# Altium PCB PCB - 100x100 - 85x85.PcbDoc
Units mil, origin at the board's own origin, x right, y up, seen from the top; angles counter-clockwise.
Board outline 1350 x 1450 mil, 2 copper layers (Top Layer, Bottom Layer); 9 components, 21 nets, 75 pads, 0 vias.
Unrouted connection lines stored in the file: 7.
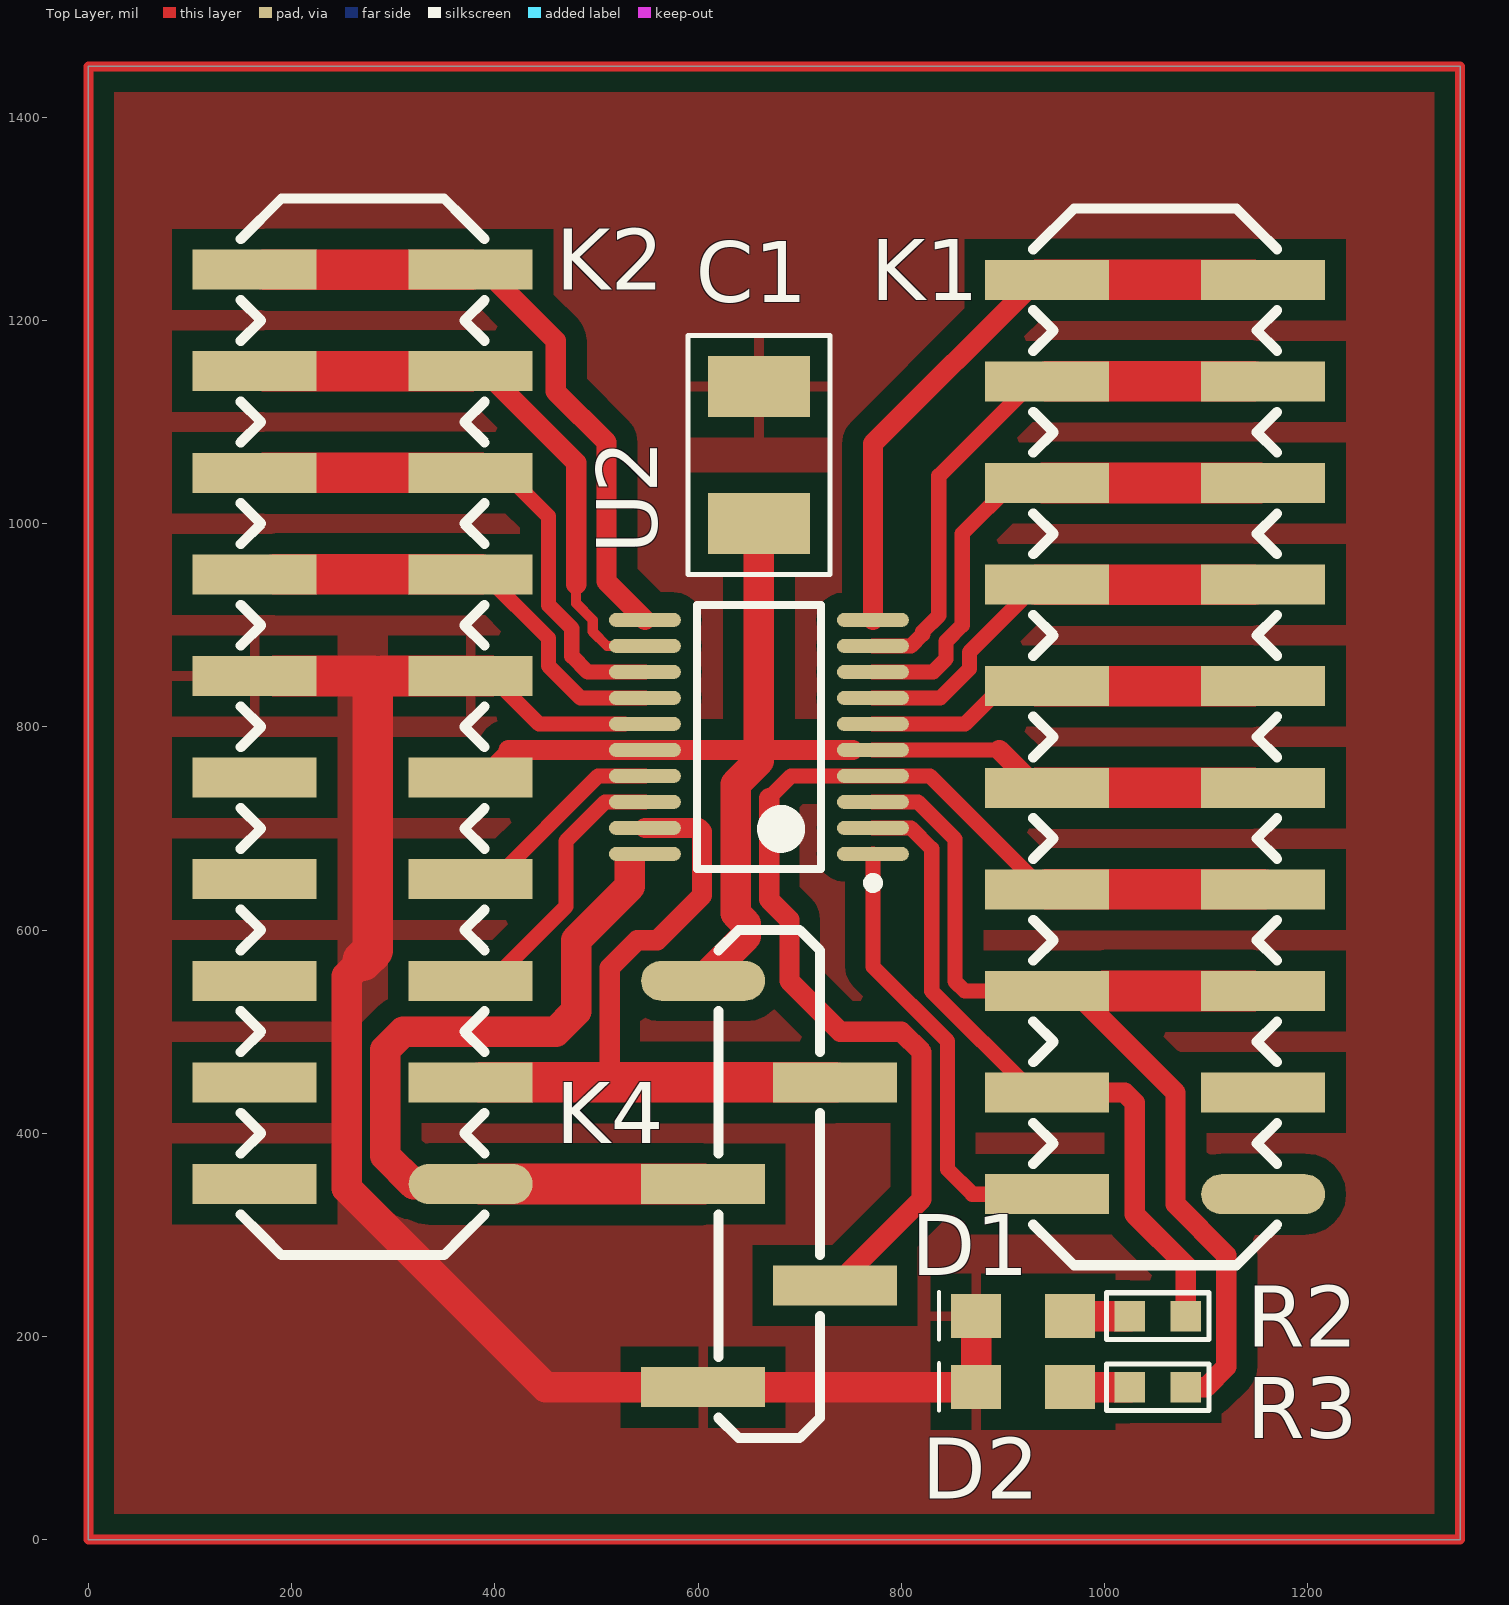
[diagram p0: Top Layer view]
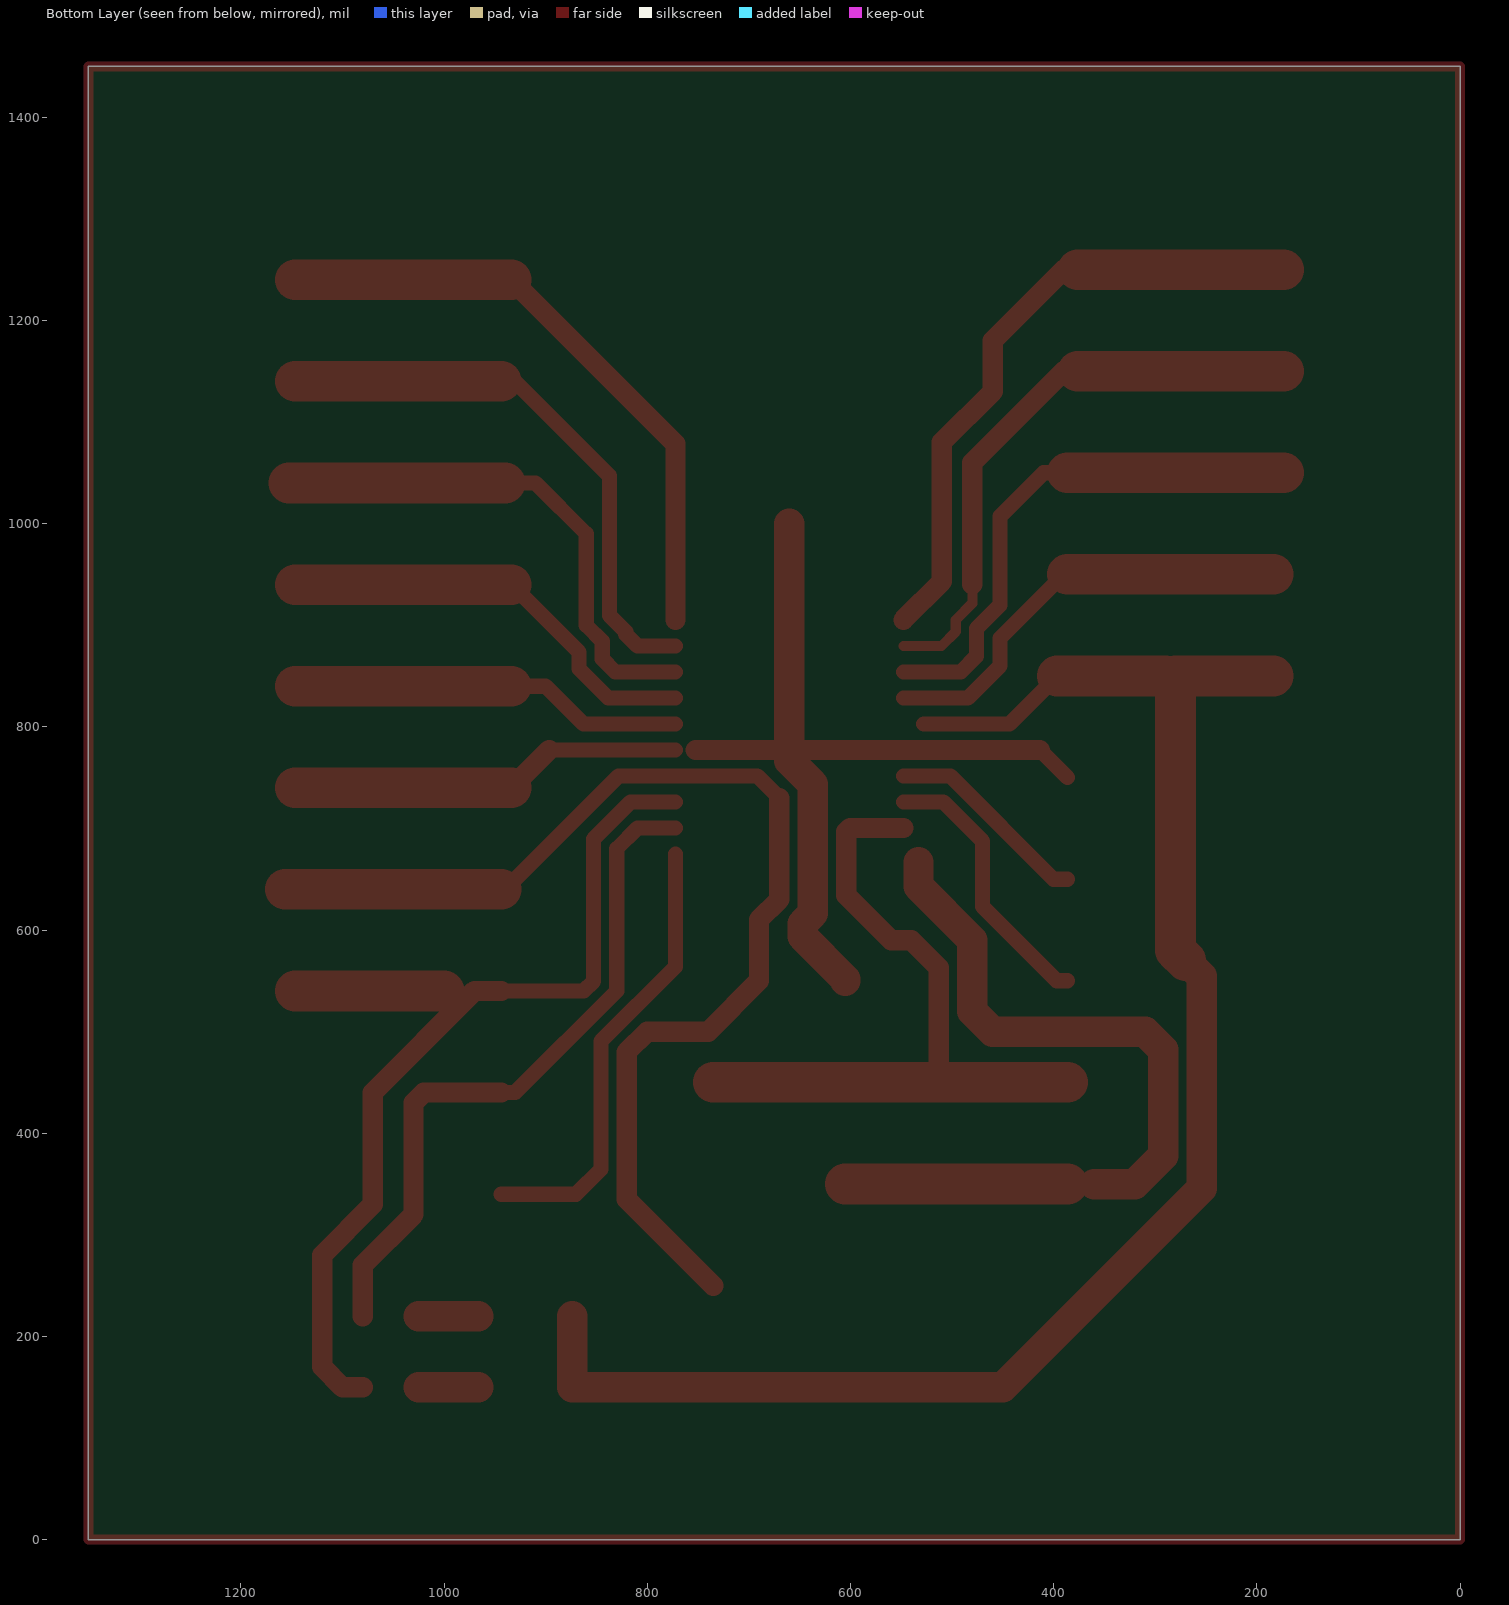
[diagram p1: Bottom Layer view, seen from below]

## Layer stack, top to bottom
Top Solder: solder mask 0.4, Solder Resist, Dk 3.5
Top Layer: signal copper 1.4
Dielectric1: dielectric 12.6, FR-4, Dk 4.8
Bottom Layer: signal copper 1.4
Bottom Solder: solder mask 0.4, Solder Resist, Dk 3.5

## Board outline
0,0 0,1450 1350,1450 1350,0

## Design rules (kind name [scope] priority, off if disabled: settings)
Clearance Clearance_1 [InPolygon] p1: gap=20
Clearance [All] p2: gap=8
MinimumSolderMaskSliver [All] p1: minsoldermaskwidth=1
PlaneConnect [All] p1: planeconnectstyle=Relief reliefexpansion=20 reliefentries=4 reliefconductorwidth=10 reliefairgap=20
PolygonConnect [All] p1: connectstyle=Relief reliefconductorwidth=10 reliefentries=4 polygonreliefangle="90 Angle" airgapwidth=20
RoutingVias [All] p1: holewidth=28 width=50 viastyle="Through Hole" minholewidth=28 minwidth=50 maxholewidth=28 maxwidth=50
SilkToSilkClearance [All] p1: silktosilkclearance=0
SilkToSolderMaskClearance [IsPad] p1: minsilkscreentomaskgap=0 clearancetoexposedcopper=TRUE
SolderMaskExpansion [All] p1: expansion=4
Width [All] p1: maxlimit=100 minlimit=10 preferedwidth=20
26 further rules are at their usual default settings.

## Components (designator, comment, footprint, x,y, rotation, side; value= is the part's Value field where it differs from the comment)
C1 "TBD" 1210C-GENERIC 660,1000 r90 top
D1 "0805" 0805LED 920,220 r180 top
D2 "0805" 0805LED 920,150 r180 top
K1 "Connector_Headers_SMD_M_10x2" "Header_Male_2.54 10x2" 1050,340 r180 top
K2 "Connector_Headers_SMD_M_10x2" "Header_Male_2.54 10x2" 270,350 r180 top
K4 "Connector_Headers_SMD_M_5x1-SWD" "Header_Male_2.54 5x1" 670,550 r0 top
R2 "120R" 0603R-120 1080,220 r180 top
R3 "120R" 0603R-120 1080,150 r180 top
U2 "Microcontrollers_ST_ARM_STM32F0_STM32F030F4P6" STM-TSSOP20_N 660,790 r180 top

## Footprints (in the part's own frame and the unit in brackets; to place one, negate y for a bottom-side part, rotate by r counter-clockwise, add the part's x,y. Pads: shape width x height; smd on the part's side, far side on the other; paste and mask are expansions set on the pad)
0603R-120 [mil] "RESISTOR 0603"
  rect 30x30 smd: 1(0,0) 2(55,0)
  silkscreen extent -23,-23 78,23, body extent -4,-15 59,15, height 20
0805LED [mm]
  rect 1.25x1.1 smd: A(-1.175,0) K(1.175,0)
  silkscreen extent 2.1,-0.6 2.1,0.59
1210C-GENERIC [mil]
  rect 60x100 smd: 1(0,0) 2(135,0)
  silkscreen extent -50,-70 185,70, body extent -10,-50 145,50, height 46
"Header_Male_2.54 5x1" [mm]
  oval 3.1x1 smd: 1(-1.651,0)
  rect 3.1x1 smd: 2(1.651,-2.54) 3(-1.651,-5.08) 4(1.651,-7.62) 5(-1.651,-10.16)
  silkscreen extent -1.27,-11.43 1.27,1.27
"Header_Male_2.54 10x2" [mm]
  oval 3.1x1 smd: 1(-2.7,0)
  rect 3.1x1 smd: 2(2.7,0) 3(-2.7,-2.54) 4(2.7,-2.54) 5(-2.7,-5.08) 6(2.7,-5.08) 7(-2.7,-7.62) 8(2.7,-7.62) 9(-2.7,-10.16) 10(2.7,-10.16) 11(-2.7,-12.7) 12(2.7,-12.7) 13(-2.7,-15.24) 14(2.7,-15.24) 15(-2.7,-17.78) 16(2.7,-17.78) 17(-2.7,-20.32) 18(2.7,-20.32) 19(-2.7,-22.86) 20(2.7,-22.86)
  silkscreen extent -3.05,-24.64 3.05,1.78, body extent -3.75,-24.13 3.75,1.27, height 9.57
STM-TSSOP20_N [mm] "SOP, 20-Leads, Body 6.6x4.5mm, Pitch 0.65mm, IPC Medium Density"
  oval 1.8x0.35 smd: 1(-2.85,2.925) 2(-2.85,2.275) 3(-2.85,1.625) 4(-2.85,0.975) 5(-2.85,0.325) 6(-2.85,-0.325) 7(-2.85,-0.975) 8(-2.85,-1.625) 9(-2.85,-2.275) 10(-2.85,-2.925) 11(2.85,-2.925) 12(2.85,-2.275) 13(2.85,-1.625) 14(2.85,-0.975) 15(2.85,-0.325) 16(2.85,0.325) 17(2.85,0.975) 18(2.85,1.625) 19(2.85,2.275) 20(2.85,2.925)
  silkscreen extent -2.98,-3.3 1.55,3.77, body extent -2.25,-3.3 2.25,3.3, height 1.2

## Part data
C1: library part Passives_Capacitors_1210_1210C-TBD, "CAPACITOR 1210 CERAMIC VALUE TO BE DETERMINED"
D1 D2: library part LED_SMD_0805
K1 K2: "SMD Header 10x2"
K4: "SWD SMD Header 5x1 for STM32"
R2 R3: library part 0603R-120, "GENERIC RESISTOR 0603"
U2: "ARM Cortex-M0 32-bit MCU, 16 KB Flash, 4 KB Internal RAM, 15 I/Os, 20-pin TSSOP, -40 to 85 degC, Tube"

## Nets (pads, with @x,y where several pads share a name; then routed paths per layer and width w, separated by ;. In a path a pad name is that pad's centre, name@x,y a point inside that pad or via, vN(x,y) a via of type N, cw(c..) or ccw(c..) an arc to the next point about the centre after c; other vN are vias at no path point)
3V3: C1.1 K1.9 K1.10 K2.9 K2.10 K4.1 U2.5 U2.16 | length 1247.7
  Top Layer w15: K2.9@386.3,750 413.5,777.2 ; U2.5 896.5,777.2
  Top Layer w20: 413.5,777.2 U2.16 660,777.2 U2.5@752.2,777.2 ; 896.5,777.2 K1.10@933.7,740
  Top Layer w30: K4.1 605,551.67 647,593.67 647,606.33 637,616.33 637,743.67 660,766.67 660,777.2 C1.1
  Top Layer w40: K1.10@933.7,740 K1.9@1146.3,740
BOOT0: K1.1 K1.2 U2.1 | length 449.1
  Top Layer w15: U2.1 772.2,563.86 845.5,490.56 845.5,364.5 870,340 K1.2
GND: C1.2 D1.K D2.K K2.11 K2.12 K4.5 U2.15 | length 1639.1
  Top Layer w15: K2.11@396.3,850 443.5,802.8 U2.15@527.8,802.8
  Top Layer w30: 270,570 254.28,554.28 254.28,345.72 450,150 K4.5 D2.K D1.K
  Top Layer w40: K2.12@183.7,850 280,850 280,580 270,570 ; 290,850 K2.11@396.3,850
NetD1_A: D1.A R2.2 | length 58.7
  Top Layer w30: D1.A R2.2
NetD2_A: D2.A R3.2 | length 58.7
  Top Layer w30: D2.A R3.2
NRST: K1.7 K1.8 K4.4 U2.4 | length 1154
  Top Layer w15: 670,730 690,750 691.61,751.61 U2.4 828.39,751.61 940,640 K1.8
  Top Layer w20: 670,730 670,630 690,610 690,550 740,500 800,500 820,480 820,335 K4.4
  Top Layer w40: K1.8 K1.7
PA0: K1.11 K1.12 U2.6 | length 389.5
  Top Layer w15: U2.6 862.8,802.8 900,840 K1.12@933.7,840
  Top Layer w40: K1.12@933.7,840 K1.11@1146.3,840
PA1: K1.13 K1.14 U2.7 | length 429.9
  Top Layer w15: U2.7 838.39,828.39 867.18,857.18 867.18,873.48 K1.14@933.7,940
  Top Layer w40: K1.14@933.7,940 1030,940 K1.13@1146.3,940
PA2: K1.15 K1.16 U2.8 | length 514.1
  Top Layer w15: U2.8 831.45,853.98 844.18,866.7 844.18,884.18 860,900 860,990 910,1040 K1.16@933.7,1040
  Top Layer w40: K1.16@940,1040 K1.15@1152.6,1040
PA3: K1.17 K1.18 U2.9 | length 564
  Top Layer w15: U2.9 809.57,879.57 821.18,891.18 821.18,893.7 837,909.53 837,1047 930,1140 K1.18
  Top Layer w40: K1.18 K1.17@1146.3,1140
PA4: K1.19 K1.20 U2.10 | length 614.3
  Top Layer w20: U2.10 772.2,1078.5 K1.20@933.7,1240
  Top Layer w40: K1.20@933.7,1240 K1.19@1146.3,1240
PA5: K2.19 K2.20 U2.11 | length 626.5
  Top Layer w20: K2.19 390,1250 460,1180 460,1130 510,1080 510,942.95 U2.11
  Top Layer w40: K2.20@173.7,1250 K2.19
PA6: K2.17 K2.18 U2.12 | length 574
  Top Layer w10: 480,940 480,921.52 496.32,905.2 496.32,893.68 510.43,879.57 U2.12
  Top Layer w20: K2.17 390,1150 480,1060 480,940
  Top Layer w40: K2.18@173.7,1150 K2.17
PA7: K2.15 K2.16 U2.13 | length 522.5
  Top Layer w15: K2.15@386.3,1050 410,1050 452.82,1007.18 452.82,919.7 475.82,896.7 475.82,869.53 491.37,853.98 U2.13
  Top Layer w40: K2.16@173.7,1050 K2.15@386.3,1050
PA9: K2.7 K2.8 U2.17 | length 203.6
  Top Layer w15: K2.7@386.3,650 400,650 501.61,751.61 U2.17
PA10: K2.5 K2.6 U2.18 | length 272.1
  Top Layer w15: K2.5@386.3,550 396.87,550 470,623.13 470,687.47 508.55,726.02 U2.18
PA13: K2.3 K2.4 K4.2 U2.19 | length 703.8
  Top Layer w20: 510,450 513,453 513,563 540,590 560,590 604,634 604,696.66 600.22,700.43 U2.19
  Top Layer w40: K2.3@386.3,450 510,450 K4.2
PA14: K2.1 K2.2 K4.3 U2.20 | length 774.5
  Top Layer w30: K2.1@360,350 320,350 292.28,377.72 292.28,482.28 310,500 460,500 480,520 480,590 532.99,642.99 532.99,666.69
  Top Layer w40: K2.1@386.3,350 K4.3
PB1: K2.13 K2.14 U2.14 | length 430.4
  Top Layer w15: K2.13@386.3,950 390,950 452.82,887.18 452.82,860 484.44,828.39 U2.14
  Top Layer w40: K2.14@183.7,950 K2.13@386.3,950
PF0: K1.3 K1.4 R2.1 U2.2 | length 682.5
  Top Layer w15: U2.2 809.57,700.43 830,680 830,540 930,440 K1.4
  Top Layer w20: K1.4 1020,440 1030,430 1030,320 1080,270 R2.1
PF1: K1.5 K1.6 R3.1 U2.3 | length 983.6
  Top Layer w15: U2.3 816.5,726.02 853,689.53 853,549.53 862.53,540 K1.6
  Top Layer w20: K1.6 970,540 1070,440 1070,330 1120,280 1120,170 1100,150 R3.1
  Top Layer w40: K1.6@1000,540 K1.5@1146.3,540
copper on no net: | length 5600
  Top Layer w10: 0,0 0,1450 1350,1450 1350,0 0,0

## Polygon pours and split planes (outlines as drawn)
GND on Top Layer "Top Layer-No Net" (solid, pour order 2): 0,1450 1350,1450 1350,0 0,0